# EAGLE board ddpd (EAGLE 7.2.0)
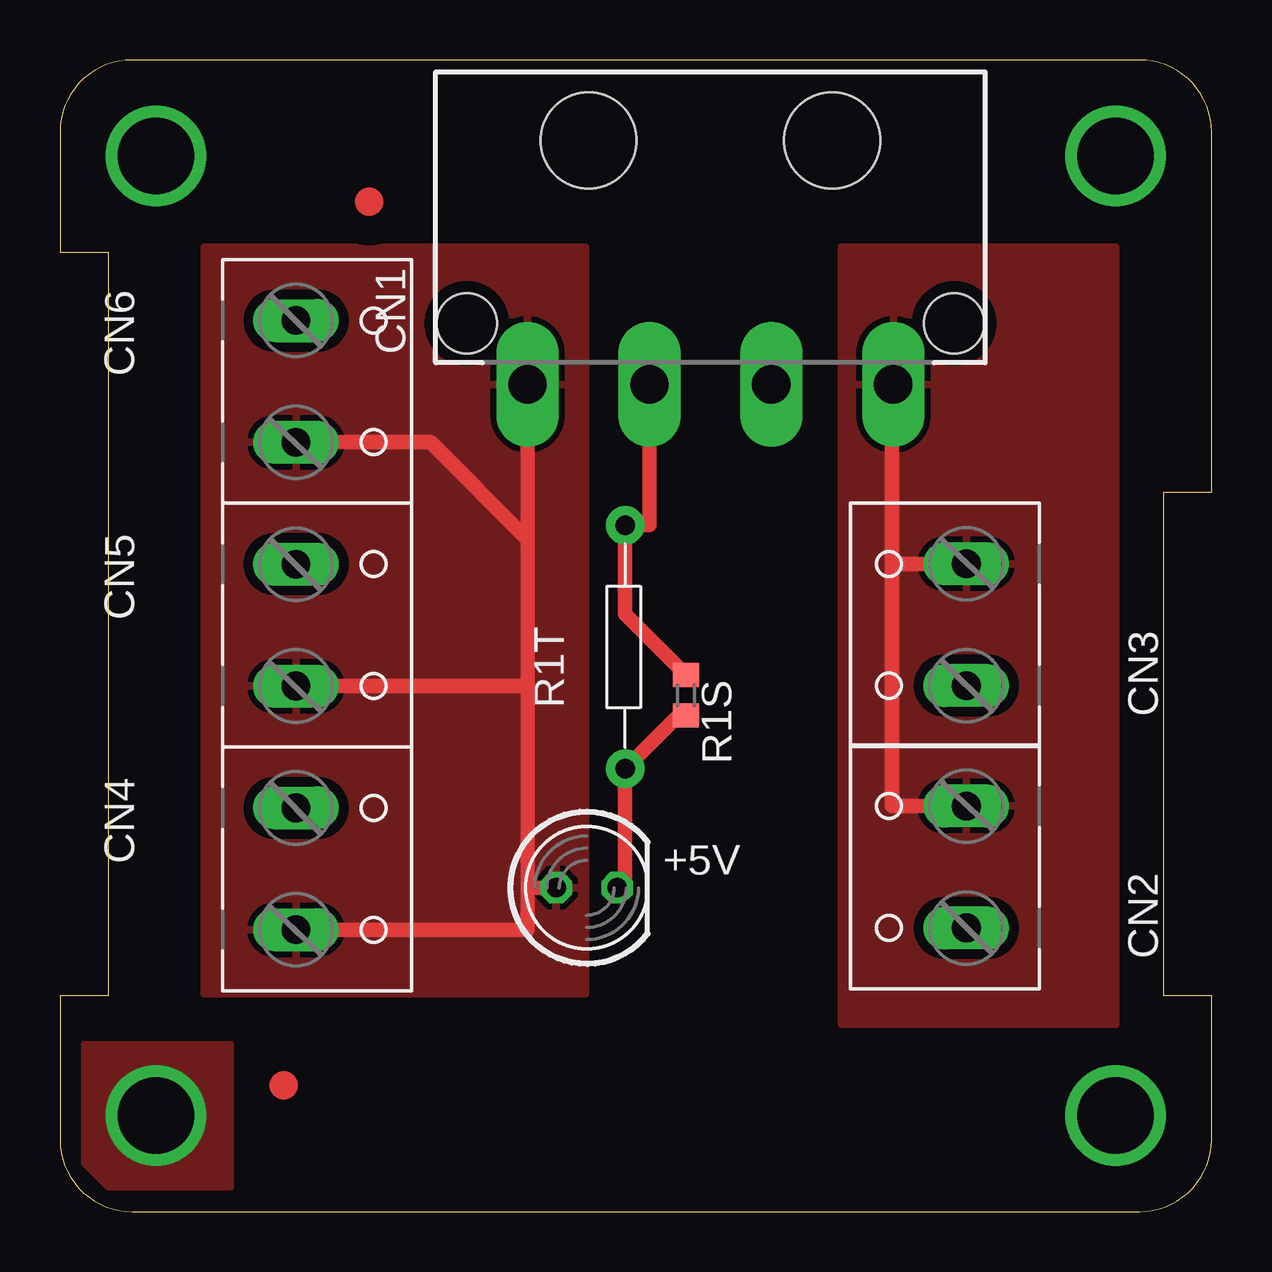
[diagram p0: board, top side]
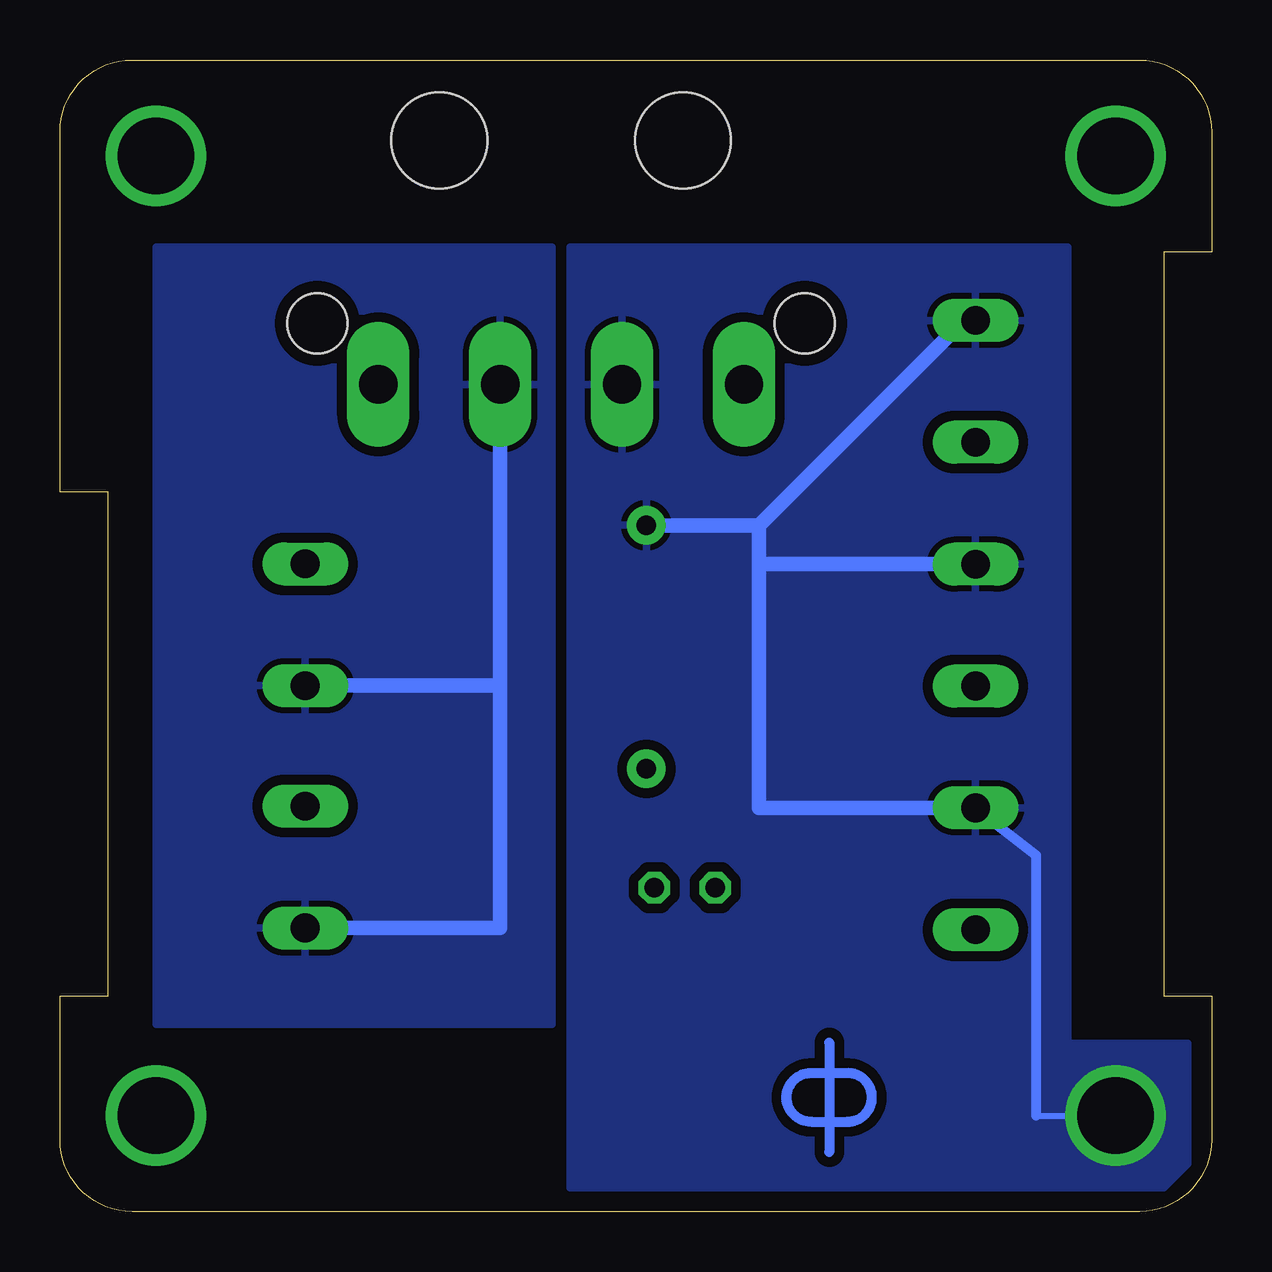
[diagram p1: board, bottom side, seen from below]

Size 48 x 48 mm. Coordinates in mm from the lower left corner, seen from the top.
Outline: 0,9 0,3 arc90 3,0 45,0 arc90 48,3 48,9 46,9 46,30 48,30 48,45 arc90 45,48 3,48 arc90 0,45 0,40 2,40 2,9 0,9
Copper layers (1*16): Top 0.035mm / dielectric 1.5mm / Bottom 0.035mm
Design rules "default": minimum track width 10mil, minimum drill 24mil, track to track 8mil, track to pad 8mil, pad to pad 8mil, via to via 8mil, smd to smd 8mil, copper to edge 20mil, drill to drill 8mil, minimum pad ring 10mil, minimum via ring 8mil, stop-mask expansion 4mil, vias tented up to drill 0mil, thermal gap 10mil

## Footprints (pad centres in the part's own frame; a part is rotated, then mirrored left to right if it is on the bottom)
LED5MM = drill 0.813 octagon: A -1.27,0; C 1.27,0
9090-4R = drill 1.6 pad 2.6 long: 1 -7.62,-6.35; 2 -2.54,-6.35; 3 2.54,-6.35; 4 7.62,-6.35 | hole 4: -5.08,3.81; 5.08,3.81 | hole 2.5: -10.16,-3.81; 10.16,-3.81
TBLK-5.08-X2 = drill 1.194 long: 1 -2.54,-0.127; 2 2.54,-0.127
R0603 = smd 1 x 1.1: 1 -0.85,0; 2 0.85,0
R4TENTHS = drill 0.813 pad 1.6: 1 -5.08,0; 2 5.08,0

## Placement (x,y rotation side)
+5V  LED-5MM-GRN  [LED5MM]  21.96,13.5 0 top
CN1  9090-4V  [9090-4R]  27.11,40.83 0 top
CN2  [TBLK-5.08-X2]  37.65,14.36 90 top
CN3  [TBLK-5.08-X2]  37.65,24.46 90 top
CN4  [TBLK-5.08-X2]  9.97,14.28 270 top
CN5  [TBLK-5.08-X2]  9.97,24.44 270 top
CN6  [TBLK-5.08-X2]  9.97,34.6 270 top
R1S  560  [R0603]  26.1,21.52 270 top
R1T  560  [R4TENTHS]  23.56,23.53 90 top
U$1  [DPI-1]  15.94,4.76 0 bottom
U$2  [FIDUCIAL]  9.33,5.27 0 top
U$3  [FIDUCIAL]  12.89,42.1 180 top
U$4  DP_FRAME_P  [LETTER_P]  -2.35,-2.35 0 top

## Library data of the parts
+5V = dpi-diopto; VENDOR: Digikey; VENDOR-PART-NUM: 160-1852-ND
CN1 = dpi-conn; VENDOR: Mouser; VENDOR-PART-NUM: 538-15-24-4441
CN2-CN6 = dpi-conn; VENDOR: Digikey; VENDOR-PART-NUM: ED2609-ND
R1S = dpi-passive; VENDOR: Digikey; VENDOR-PART-NUM: 311-560HRTR-ND
R1T = dpi-passive; VENDOR: Digikey; VENDOR-PART-NUM: CF18JT560RCT-ND
U$1-U$4 = DP

## Nets
+5V: +5V.A CN1.1 CN4.2 CN5.2 CN6.2
+5V/2: CN1.4 CN2.2 CN3.2
GND: CN1.2 CN4.1 CN5.1 CN6.1 R1S.1 R1T.2
GND1: CN1.3 CN2.1 CN3.1
N$5: +5V.C R1S.2 R1T.1

## Tracks (layer width: path | path; a pad name or v marks a point on that pad's centre or on a via)
+5V
  Top 0.61: CN5.2 19.49,21.9 19.49,21.94 | 19.49,21.94 19.49,28.01 | 19.49,28.01 19.49,34.62 | 19.49,34.62 CN1.1 | 19.49,34.62 19.49,32.06 | CN4.2 19.49,11.74 19.49,13.47 | 19.49,13.47 19.49,21.94 | +5V.A 19.49,13.5 19.49,13.47 | CN6.2 15.44,32.06 19.49,28.01
  pour Top (isolate 0.406): 21.9,40.19 21.9,9.08 6,9.08 6,40.19
+5V/2
  Top 0.61: CN1.4 34.68,34.66 34.68,26.92 | CN3.2 34.68,27 34.68,26.92 | CN2.2 34.68,16.9 34.68,26.92
  pour Top (isolate 0.406): 44,40.19 44,7.81 32.57,7.81 32.57,40.19
GND  (via drill 3.17 pad 3.17)
  Top 0.61: R1S.1 23.55,24.91 R1T.2 24.57,28.61 CN1.2
  Bottom 0.254: 7.32,4 v4,4
  Bottom 0.406: CN4.1 7.32,14.86 7.32,4.69 7.32,4
  Bottom 0.61: CN6.1 10.32,37.15 18.87,28.6 | 18.87,28.6 23.54,28.6 R1T.2 | 18.87,26.98 CN5.1 | 18.87,26.98 18.87,28.6 | CN4.1 18.87,16.82 18.87,26.98
  pour Bottom (isolate 0.406): 26.73,40.19 26.73,1 2,1 1,2 1,7.01 6,7.01 6,40.19
  pour Top: 1.12,7 7.12,7 7.12,1 2.12,1 1.12,2
GND1
  Bottom 0.61: 29.65,21.92 CN1.3 | 29.65,21.92 CN3.1 | CN2.1 29.65,11.82 29.65,21.92
  pour Bottom (isolate 0.406): 44,40.19 44,7.81 27.49,7.81 27.49,40.19
MOUNT  (via drill 3.17 pad 3.17)
  other vias: 44,44
N$1
  pour Top: 1,7 7,7 7,1 2,1 1,2
N$4  (via drill 3.17 pad 3.17)
  other vias: 4,44
N$5
  Top 0.61: R1S.2 25.78,20.67 R1T.1 23.55,13.83 +5V.C
N$6  (via drill 3.17 pad 3.17)
  other vias: 44,4

## Text on the board
tTest: 5V | R1T | 12V | 5V | R1S | 12V | 5V | (C) 2021, Demand Peripherals, Inc. | DDPD, Rev 21A